# Altium PCB plant_factory.PcbDoc
Units mil, origin at the board's own origin, x right, y up, seen from the top; angles counter-clockwise.
Board outline 4724.41 x 3346.46 mil, 2 copper layers (Top Layer, Bottom Layer); 63 components, 125 nets, 345 pads, 62 vias.
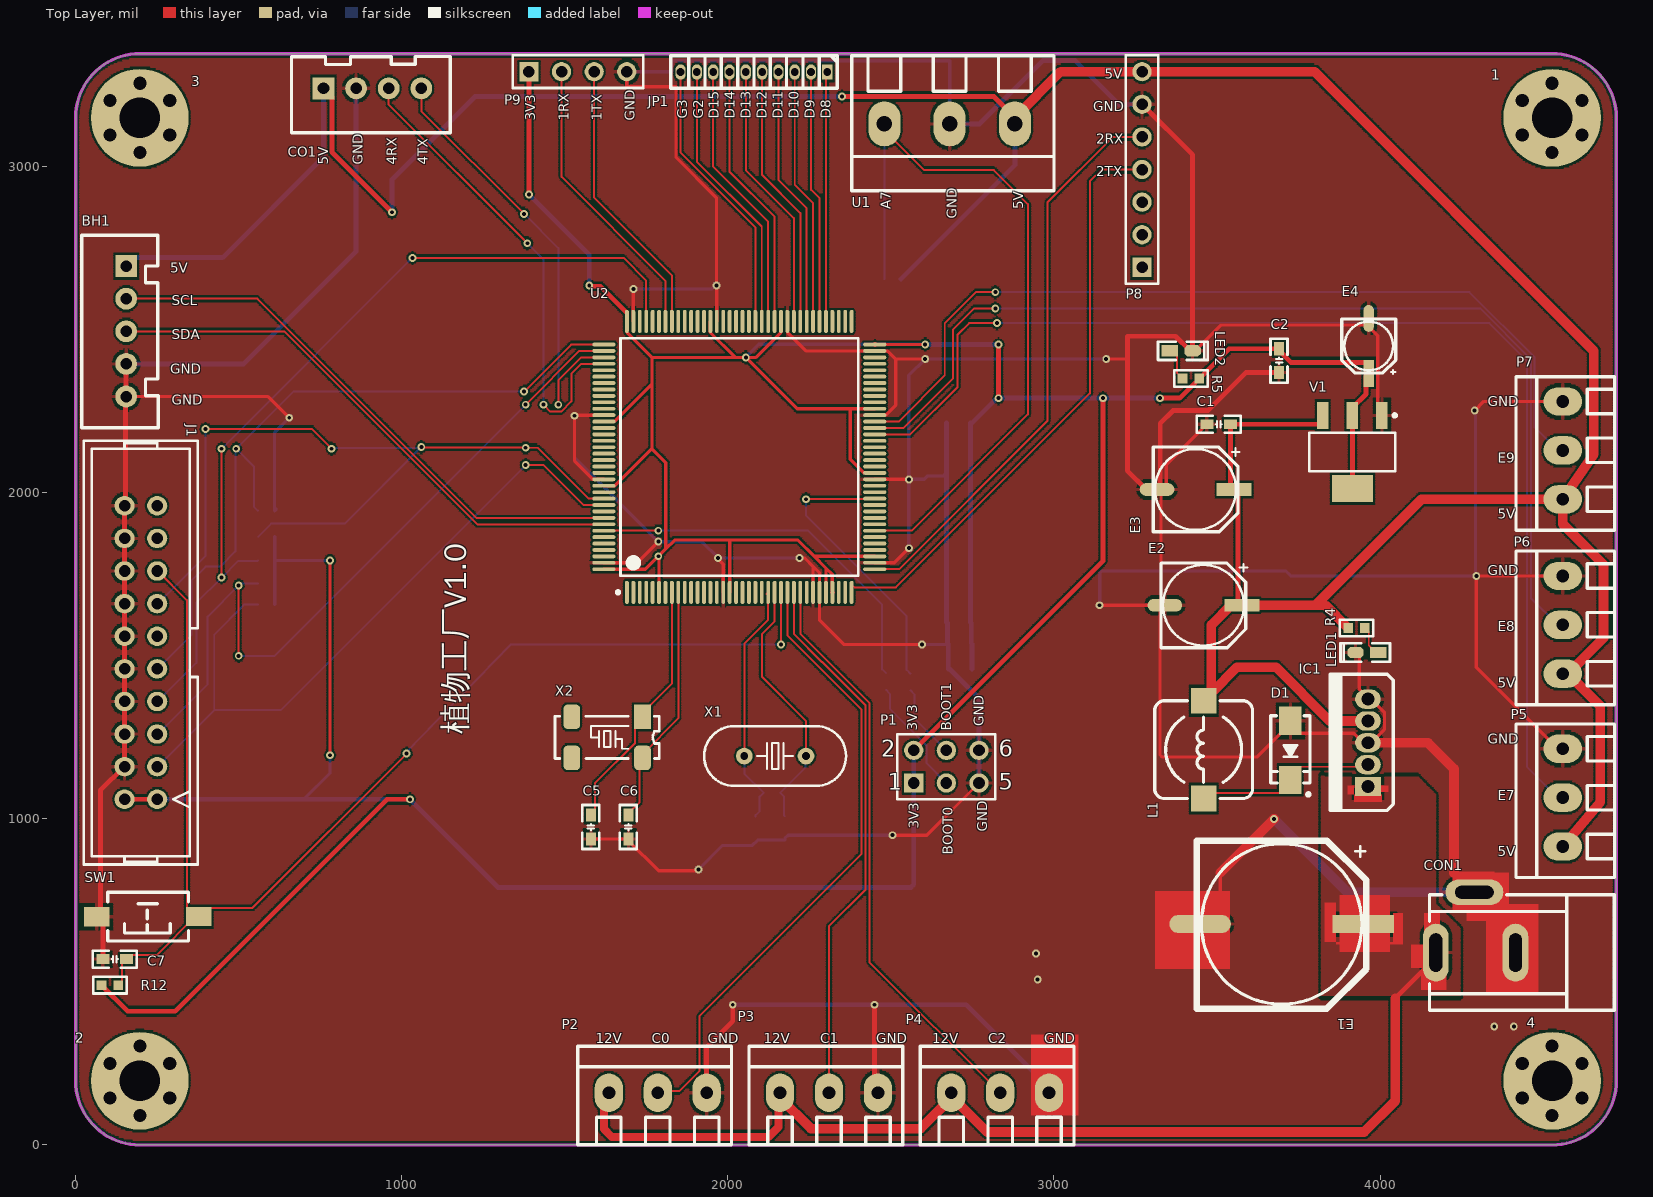
[diagram p0: Top Layer view]
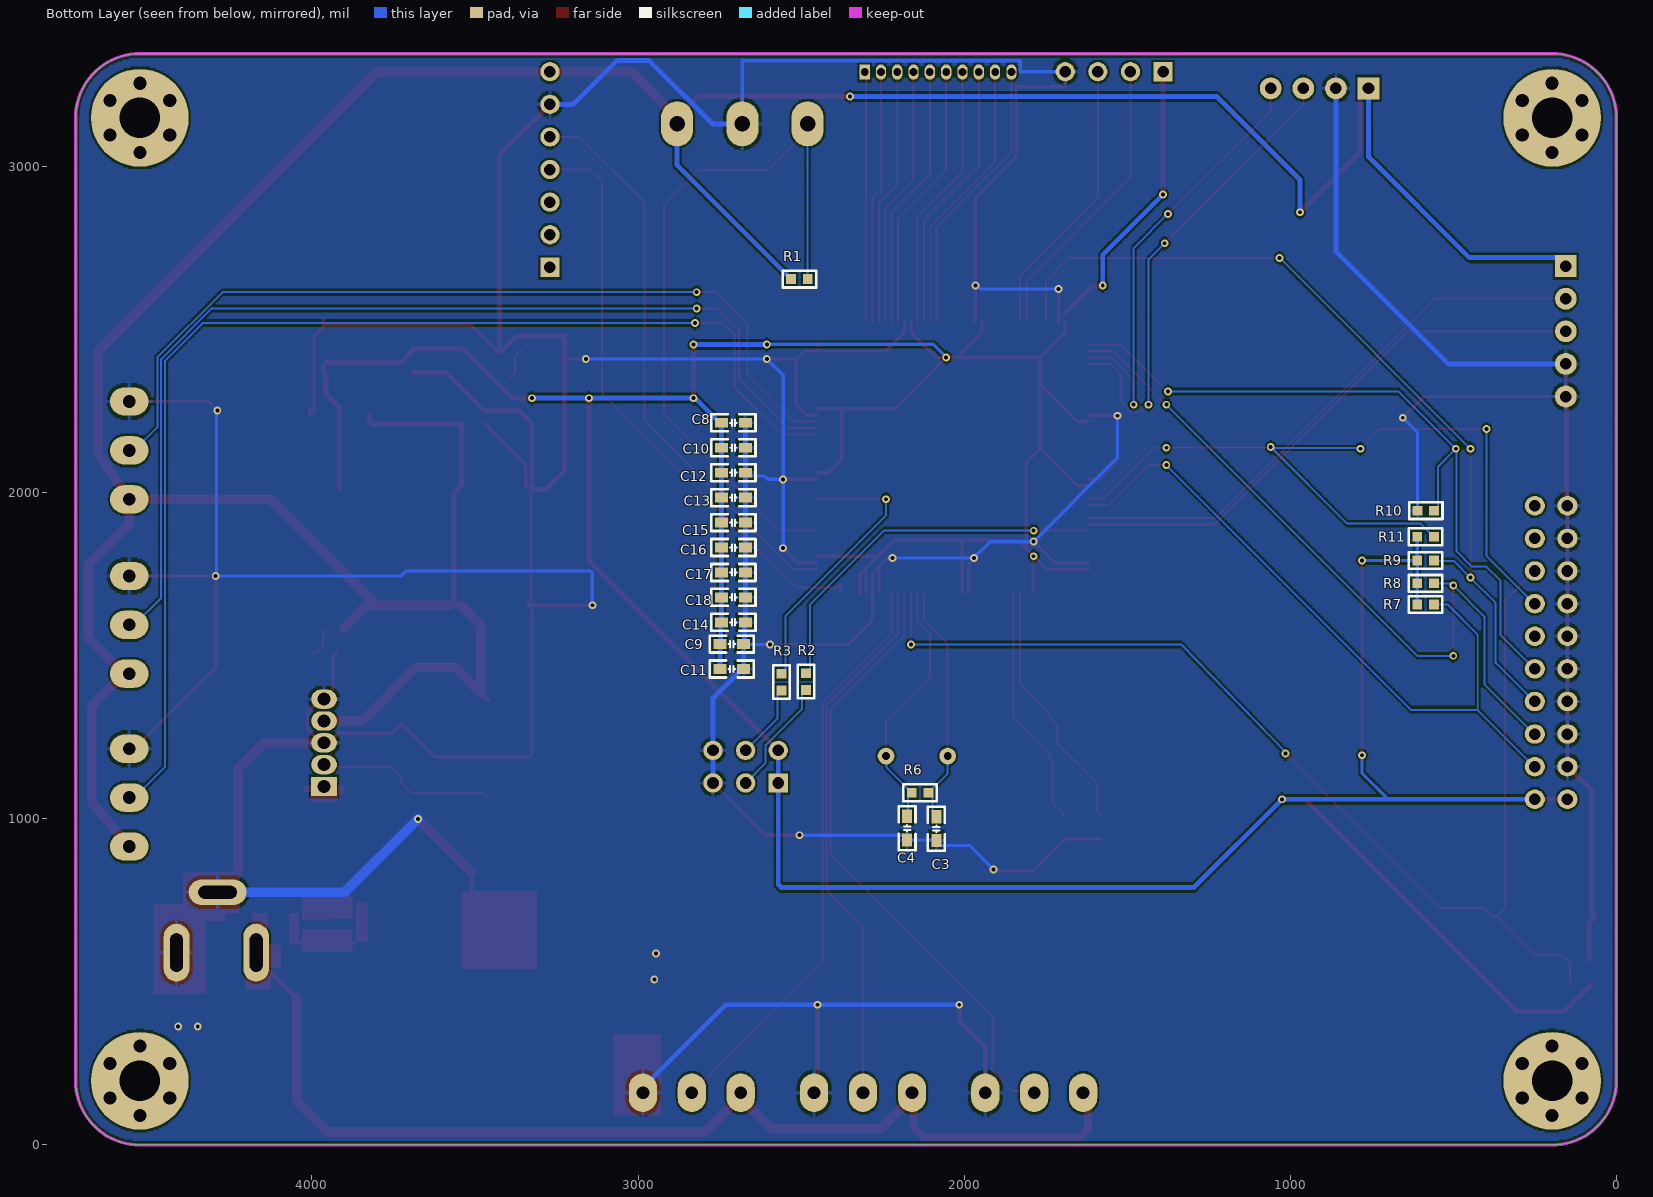
[diagram p1: Bottom Layer view, seen from below]

## Layer stack, top to bottom
Top Solder: solder mask 0.4, Solder Resist, Dk 3.5
Top Layer: signal copper 1.4
Dielectric 1: dielectric 12.6, FR-4, Dk 4.8
Bottom Layer: signal copper 1.4
Bottom Solder: solder mask 0.4, Solder Resist, Dk 3.5

## Board outline
0,196.85 ccw(c196.85,196.85) 196.85,0 4527.56,0 ccw(c4527.56,196.85) 4724.41,196.85 4724.41,3149.61 ccw(c4527.56,3149.61) 4527.56,3346.46 196.85,3346.46 ccw(c196.85,3149.61) 0,3149.61

## Design rules (kind name [scope] priority, off if disabled: settings)
Clearance [All] p1: gap=6 ignorepadtopadclearanceinfootprint=TRUE
PolygonConnect [All] p1: thpad.connectstyle=Relief thpad.reliefconductorwidth=10 thpad.reliefentries=4 thpad.polygonreliefangle="90 Angle" thpad.airgapwidth=10 smdpad.connectstyle=Relief smdpad.reliefconductorwidth=10 smdpad.reliefentries=4 smdpad.polygonreliefangle="90 Angle" smdpad.airgapwidth=10 via.connectstyle=Direct via.reliefconductorwidth=10 via.reliefentries=4 via.polygonreliefangle="90 Angle" via.airgapwidth=10
RoutingVias [All] p1: holewidth=12 width=24 viastyle="Through Hole" minholewidth=12 minwidth=24 maxholewidth=12 maxwidth=24
SilkToSilkClearance [All] p1: silktosilkclearance=2
SilkToSolderMaskClearance [IsPad] p1: minsilkscreentomaskgap=2 clearancetoexposedcopper=TRUE
SolderMaskExpansion [All] p1: expansion=2.5
Width PWR [InNetClass('PWR')] p1: maxlimit=20 minlimit=10 preferedwidth=15
Width [All] p2: maxlimit=6 minlimit=6 preferedwidth=6
28 further rules are at their usual default settings.

## Classes and differential pairs
net class "New Class": NetD1_2 NetLED1_1 NetLED2_1 NetP1_3 NetP1_4 RESET
net class P: PA0 PA1 PA4 PA5 PA6 PA7 PA8 PA11 PA12 PB0 PB1 PB5 PB8 PB9 PB10 PB11 PB12 PB13 PB14 PB15 PC0 PC1 PC2 PC3 PC4 PC5 PC6 PC7 PC8 PC9 PC12 PC13 PD0 PD1 PD2 PD3 PD4 PD5 PD6 PD7 PD8 PD9 PD10 PD11 PD12 PD13 PD14 PD15 PE0 PE1 PE2 PE3 PE4 PE5 PE6 PE7 PE8 PE9 PE10 PE11 PE12 PE13 PE14 PE15 PF0 PF1 PF2 PF3 PF4 PF5 PF6 PF7 PF8 PF9 PF10 PF11 PF12 PF13 PF14 PF15 PG0 PG1 PG2 PG3 PG4 PG5 PG6 PG7 PG8 PG9 PG10 PG11 PG12 PG13 PG14 PG15
net class OSC: OSC32_IN OSC32_OUT OSC_IN OSC_OUT
net class BOOT: BOOT0 BOOT1
net class JTAG: JTCK JTDI JTDO JTMS JTRST
net class UART: SCL SDA UART1_RX UART1_TX UART2_RX UART2_TX UART4_RX UART4_TX
net class PWR: 3V3 5V 12V GND

## Components (designator, comment, footprint, x,y, rotation, side; value= is the part's Value field where it differs from the comment)
1 "M3" "M3 125X300" 4527.56,3149.61 r90 top locked
2 "M3" "M3 125X300" 196.85,196.85 r90 top locked
3 "M3" "M3 125X300" 196.85,3149.61 r90 top locked
4 "M3" "M3 125X300" 4527.56,196.85 r90 top locked
BH1 "HDR-1X5" XH2.54-LI-5P 155,2495 r270 top
C1 "104" C0603_M 3505,2210 r0 top
C2 "104" C0603_M 3690,2405 r90 top
C3 "22pf" C0603_M 2085,970 r270 bottom
C4 "22pf" C0603_M 2175,971.5 r270 bottom
C5 "10pf" C0603_M 1580,975 r270 top
C6 "10pf" C0603_M 1695,975 r270 top
C7 "104" C0603_M 120,570 r180 top
C8 "104" C0603_M 2707.32,2214.53 r0 bottom
C9 "104" C0603_M 2712.32,1536.03 r0 bottom
C10 "104" C0603_M 2707.32,2138.03 r0 bottom
C11 "104" C0603_M 2712.32,1459.53 r0 bottom
C12 "104" C0603_M 2707.32,2061.53 r0 bottom
C13 "104" C0603_M 2707.32,1985.03 r0 bottom
C14 "104" C0603_M 2707.32,1602.53 r0 bottom
C15 "104" C0603_M 2707.32,1908.53 r0 bottom
C16 "104" C0603_M 2707.32,1832.03 r0 bottom
C17 "104" C0603_M 2707.32,1755.53 r0 bottom
C18 "104" C0603_M 2707.32,1679.03 r0 bottom
CO1 "HDR-1X4" XH2.54-LI-4P 910,3240 r0 top
CON1 "3.5*1.3" DC-005 4415,590 r0 top locked
D1 "1N4007" SMA 3725,1210 r270 top
E1 "680uF/35V" "CE G(12.5*13.5)" 3698.01,677.67 r0 top locked
E2 "220uF/10V" "CE D(6.3*7.7)" 3458.11,1655 r0 top
E3 "220uF/10V" "CE D(6.3*7.7)" 3434.05,2010 r0 top
E4 "47uF/10V" "CE B(4*5.4)" 3965,2450 r270 top
IC1 "LM2596T" TO220-5A 3962.76,1099.35 r90 top
J1 "JTAG" JTAG_20 200,1510 r90 top locked
JP1 "HDR-1X10" HDR1.27-LI-10P 2080,3290 r180 top
L1 "33uH" CDRH74 3458.76,1212.21 r90 top
LED1 "绿色" LED0603_G 3959.39,1510.26 r180 top
LED2 "绿色" LED0603_G 3390,2434.74 r0 top
P1 "Header 3X2" HDR2X3 2570,1110 r0 top
P2 "HDR-1X3" KF128-3.81-3P 1785,160 r0 top locked
P3 "HDR-1X3" KF128-3.81-3P 2310,160 r0 top locked
P4 "HDR-1X3" KF128-3.81-3P 2835,160 r0 top locked
P5 "HDR-1X3" KF128-3.81-3P 4560,1065 r90 top
P6 "HDR-1X3" KF128-3.81-3P 4560,1595 r90 top
P7 "HDR-1X3" KF128-3.81-3P 4560,2130 r90 top
P8 "Header 7" HDR1X7 3270,2691.06 r90 top
P9 "Header 4" HDR1X4 1390,3291.06 r0 top
R1 "4.7K" R0603_L 2505,2655 r0 bottom
R2 "10K" R0603_L 2485,1420.86 r270 bottom
R3 "10K" R0603_L 2560,1419.41 r90 bottom
R4 "750" R0603_L 3927.6,1585 r0 top
R5 "510" R0603_L 3420,2350 r180 top
R6 "1M" R0603_L 2135,1080 r180 bottom
R7 "10K" R0603_L 585,1657.32 r180 bottom
R8 "10K" R0603_L 585,1722.32 r180 bottom
R9 "10K" R0603_L 585,1792.32 r180 bottom
R10 "10K" R0603_L 584.41,1945 r180 bottom
R11 "10K" R0603_L 585,1865 r180 bottom
R12 "10K" R0603_L 105,490 r180 top
SW1 "3x6x5" "SW SMD-3*6*2.5" 220,700 r180 top
U1 "DS18B20" KF128-5.08-3P 2680,3131 r180 top
U2 "STM32F101ZET6" LQFP144_N 2035,2110 r90 top locked
V1 "AMS1117-3V3" SOT223_L 3915,2125 r270 top
X1 "8MHz" HC-49S 2145,1192.65 r0 top
X2 "Comment" MC-306 1630,1250 r180 top

## Footprints (in the part's own frame and the unit in brackets; to place one, negate y for a bottom-side part, rotate by r counter-clockwise, add the part's x,y. Pads: shape width x height; smd on the part's side, far side on the other; paste and mask are expansions set on the pad)
C0603_M [mil] "贴片MLCC电容"
  rect 40x30 smd: 1(-36.5,0) 2(36.5,0)
  silkscreen extent -68,-26 68,26, body extent -31,-16 31,16, height 33
CDRH74 [mm] "7.3*7.3*4.5mm（长宽高）"
  rect 2x2 smd: 1(-3.81,0) 2(3.81,0)
  silkscreen extent -3.81,-3.81 3.81,3.81, body extent -3.65,-3.65 3.65,3.65, height 4.52
"CE B(4*5.4)" [mm] "贴片电解电容，直径4mm，高5.4mm"
  rect 2.1x0.8 smd: 1(2.15,0)
  oval 2.1x0.8 smd: 2(-2.15,0)
  silkscreen extent -2.1,-2.1 2.2,2.1, body extent -2.3,-2.15 2.3,2.15, height 5.45
"CE D(6.3*7.7)" [mm] "贴片电解电容，直径6.3mm，¸"
  rect 2.7x1 smd: 1(3,0)
  oval 2.7x1 smd: 2(-3,0)
  silkscreen extent -3.3,-3.3 3.43,3.3, body extent -3.5,-3.3 3.5,3.3, height 7.75
"CE G(12.5*13.5)" [mm] "贴片电解电容，直径12.5mm，高"
  rect 4.8x1.4 smd: 1(6.35,0)
  oval 4.8x1.4 smd: 2(-6.35,0)
  silkscreen extent -6.6,-6.6 6.6,6.5, body extent -7.15,-6.5 7.15,6.5, height 13.58
DC-005 [mm] "DC母座5.5mm"
  oval 2x4.5 hole 1 slot 3 at 90 deg: 1(-6.2,0) 2(0,0)
  oval 4.5x2 hole 1 slot 3 at 0 deg: 3(-3.2,4.7)
  silkscreen extent -6.7,-4.5 7.7,4.5, body extent -6.55,-4.5 7.5,4.8, height 11.25
HC-49S [mm] "封装?"
  round 1.3 hole 0.6: 1(-2.4,0) 2(2.4,0)
  silkscreen extent -5.52,-2.32 5.52,2.33, body extent -5.52,-2.32 5.53,2.33, height 4.18
HDR1.27-LI-10P [mm] "直插，脚距：1.27mm"
  rect 0.8x1.2 hole 0.6: 1(-5.715,0)
  oval 0.8x1.2 hole 0.6: 2(-4.445,0) 3(-3.175,0) 4(-1.905,0) 5(-0.635,0) 6(0.635,0) 7(1.905,0) 8(3.175,0) 9(4.445,0) 10(5.715,0)
  silkscreen extent -6.48,-1.27 6.48,1.27, body extent -6.35,-1.2 6.35,1.2, height 4.48
HDR1X4 [mm] "Connector; Header; 4 Position"
  rect 1.5x1.5 hole 0.9: 1(0,0)
  round 1.5 hole 0.9: 2(2.54,0) 3(5.08,0) 4(7.62,0)
  silkscreen extent -1.27,-1.27 8.89,1.27
HDR1X7 [mm] "Connector; Header; 7 Position"
  rect 1.5x1.5 hole 0.9: 1(0,0)
  round 1.5 hole 0.9: 2(2.54,0) 3(5.08,0) 4(7.62,0) 5(10.16,0) 6(12.7,0) 7(15.24,0)
  silkscreen extent -1.27,-1.27 16.51,1.27
HDR2X3 [mm] "Connector; Header; 3x2 Position"
  rect 1.5x1.5 hole 0.9: 1(0,0)
  round 1.5 hole 0.9: 2(0,2.54) 3(2.54,0) 4(2.54,2.54) 5(5.08,0) 6(5.08,2.54)
  silkscreen extent -1.27,-1.27 6.35,3.81
JTAG_20 [mm]
  oval 1.5x1.575 hole 0.9: 1(-11.43,-1.27) 2(-11.43,1.27) 3(-8.89,-1.27) 4(-8.89,1.27) 5(-6.35,-1.27) 6(-6.35,1.27) 7(-3.81,-1.27) 8(-3.81,1.27) 9(-1.27,-1.27) 10(-1.27,1.27) 11(1.27,-1.27) 12(1.27,1.27) 13(3.81,-1.27) 14(3.81,1.27) 15(6.35,-1.27) 16(6.35,1.27) 17(8.89,-1.27) 18(8.89,1.27) 19(11.43,-1.27) 20(11.43,1.27)
  silkscreen extent -16.51,-4.45 16.51,4.45
KF128-3.81-3P [mm] "螺钉式接线端子，脚距3.81mm"
  oval 2.2x3 hole 1: 1(-3.81,0) 2(0,0) 3(3.81,0)
  silkscreen extent -6.22,-4.04 5.74,3.63, body extent -6.21,-3.9 5.72,3.5, height 8.55
KF128-5.08-3P [mm] "螺钉式接线端子，脚距5.08mm"
  oval 2.5x3.5 hole 1.2: 1(-5.08,0) 2(0,0) 3(5.08,0)
  silkscreen extent -8.13,-5.31 7.62,5.21, body extent -8.12,-5.3 7.62,5.2, height 14.18
LED0603_G [mil] "绿色0603LED"
  rect 50x35 smd: 1(-35,0.26)
  oct 50x35 smd: 2(35,0.26)
  silkscreen extent -71,-28 81,28, body extent -32,-16 31,16, height 18
LQFP144_N [mm] "Thin QFP, 144-Leads, Body 20x20mm, Pitch 0.5mm, IPC Medium Density联系卖家免费查找封装"
  oval 1.8x0.3 smd: 1(-10.55,8.75) 2(-10.55,8.25) 3(-10.55,7.75) 4(-10.55,7.25) 5(-10.55,6.75) 6(-10.55,6.25) 7(-10.55,5.75) 8(-10.55,5.25) 9(-10.55,4.75) 10(-10.55,4.25) 11(-10.55,3.75) 12(-10.55,3.25) 13(-10.55,2.75) 14(-10.55,2.25) 15(-10.55,1.75) 16(-10.55,1.25) 17(-10.55,0.75) 18(-10.55,0.25) 19(-10.55,-0.25) 20(-10.55,-0.75) 21(-10.55,-1.25) 22(-10.55,-1.75) 23(-10.55,-2.25) 24(-10.55,-2.75) 25(-10.55,-3.25) 26(-10.55,-3.75) 27(-10.55,-4.25) 28(-10.55,-4.75) 29(-10.55,-5.25) 30(-10.55,-5.75) 31(-10.55,-6.25) 32(-10.55,-6.75) 33(-10.55,-7.25) 34(-10.55,-7.75) 35(-10.55,-8.25) 36(-10.55,-8.75) 73(10.55,-8.75) 74(10.55,-8.25) 75(10.55,-7.75) 76(10.55,-7.25) 77(10.55,-6.75) 78(10.55,-6.25) 79(10.55,-5.75) 80(10.55,-5.25) 81(10.55,-4.75) 82(10.55,-4.25) 83(10.55,-3.75) 84(10.55,-3.25) 85(10.55,-2.75) 86(10.55,-2.25) 87(10.55,-1.75) 88(10.55,-1.25) 89(10.55,-0.75) 90(10.55,-0.25) 91(10.55,0.25) 92(10.55,0.75) 93(10.55,1.25) 94(10.55,1.75) 95(10.55,2.25) 96(10.55,2.75) 97(10.55,3.25) 98(10.55,3.75) 99(10.55,4.25) 100(10.55,4.75) 101(10.55,5.25) 102(10.55,5.75) 103(10.55,6.25) 104(10.55,6.75) 105(10.55,7.25) 106(10.55,7.75) 107(10.55,8.25) 108(10.55,8.75)
  oval 0.3x1.8 smd: 37(-8.75,-10.55) 38(-8.25,-10.55) 39(-7.75,-10.55) 40(-7.25,-10.55) 41(-6.75,-10.55) 42(-6.25,-10.55) 43(-5.75,-10.55) 44(-5.25,-10.55) 45(-4.75,-10.55) 46(-4.25,-10.55) 47(-3.75,-10.55) 48(-3.25,-10.55) 49(-2.75,-10.55) 50(-2.25,-10.55) 51(-1.75,-10.55) 52(-1.25,-10.55) 53(-0.75,-10.55) 54(-0.25,-10.55) 55(0.25,-10.55) 56(0.75,-10.55) 57(1.25,-10.55) 58(1.75,-10.55) 59(2.25,-10.55) 60(2.75,-10.55) 61(3.25,-10.55) 62(3.75,-10.55) 63(4.25,-10.55) 64(4.75,-10.55) 65(5.25,-10.55) 66(5.75,-10.55) 67(6.25,-10.55) 68(6.75,-10.55) 69(7.25,-10.55) 70(7.75,-10.55) 71(8.25,-10.55) 72(8.75,-10.55) 109(8.75,10.55) 110(8.25,10.55) 111(7.75,10.55) 112(7.25,10.55) 113(6.75,10.55) 114(6.25,10.55) 115(5.75,10.55) 116(5.25,10.55) 117(4.75,10.55) 118(4.25,10.55) 119(3.75,10.55) 120(3.25,10.55) 121(2.75,10.55) 122(2.25,10.55) 123(1.75,10.55) 124(1.25,10.55) 125(0.75,10.55) 126(0.25,10.55) 127(-0.25,10.55) 128(-0.75,10.55) 129(-1.25,10.55) 130(-1.75,10.55) 131(-2.25,10.55) 132(-2.75,10.55) 133(-3.25,10.55) 134(-3.75,10.55) 135(-4.25,10.55) 136(-4.75,10.55) 137(-5.25,10.55) 138(-5.75,10.55) 139(-6.25,10.55) 140(-6.75,10.55) 141(-7.25,10.55) 142(-7.75,10.55) 143(-8.25,10.55) 144(-8.75,10.55)
  silkscreen extent -10.67,-9.25 9.25,9.57, body extent -11,-11 11,11, height 1.45
"M3 125X300" [mil] "M3螺丝孔，孔125Mil，焊盘300Mil"
  round 40 hole 40: 1(-106,0) 1(-53,91.8) 1(-53,-91.8) 1(53,91.8) 1(53,-91.8) 1(106,0)
  round 300 hole 125: 1(0,0)
MC-306 [mm] "8mm*3.2mm*2.54mm(长*宽*高)"
  rect 1.3x1.9 smd: 1(-2.75,-1.6)
  rrect50% 1.3x1.9 smd: 2(2.75,-1.6) 3(2.75,1.6) 4(-2.75,1.6)
  silkscreen extent -4.06,-1.65 4.06,1.65, body extent -4,-1.63 4,1.63, height 2.56
R0603_L [mil] "1/10W贴片电阻"
  rect 30x30 smd: 1(-25.59,0) 2(25.59,0)
  silkscreen extent -51,-26 51,26, body extent -31,-16 31,16, height 16
SMA [mm] "4.5x2.6*2.2mm（长宽高，不包括引脚）联系卖家 免费查找"
  rect 2.2x1.75 smd: 1(-2.3,0) 2(2.3,0)
  silkscreen extent -2.7,-1.52 3.56,1.52, body extent -2.55,-1.3 2.55,1.3, height 2.15
SOT223_L [mm] "SOT223, 4-Leads, Body 6.5x3.5mm, Pitch 2.3mm, Lead Span 7mm, IPC High Density"
  rect 2.1x0.9 smd: 1(-2.85,2.3) 2(-2.85,0) 3(-2.85,-2.3)
  rect 2.1x3.2 smd: 4(2.85,0)
  silkscreen extent -2.97,-3.35 1.5,3.43, body extent -1.85,-3.35 1.85,3.35, height 1.7
"SW SMD-3*6*2.5" [mm] "3*6*2.5mm"
  rect 2x1.5 smd: 1(-3.996,-0.02) 2(3.937,0)
  silkscreen extent -3.21,-1.9 3.09,1.9, body extent -4,-1.75 4,1.75, height 2.59
TO220-5A [mm] "220，5脚晶体管"
  rect 1.5x2 hole 1: 1(0,0)
  oval 1.5x2 hole 1: 2(1.7,0) 3(3.4,0) 4(5.1,0) 5(6.8,0)
  silkscreen extent -1.88,-1.96 8.74,2.95, body extent -1.65,-1.8 8.45,2.7, height 17.5
XH2.54-LI-4P [mm] "接插件，4P"
  rect 1.7x1.7 hole 0.9: 1(-3.81,0)
  round 1.7 hole 0.9: 2(-1.27,0) 3(1.27,0) 4(3.81,0)
  silkscreen extent -6.3,-3.45 6.07,2.49, body extent -6.31,-3.3 6.31,2.4, height 7.05
XH2.54-LI-5P [mm] "接插件，5P  淘宝ID:黄晶宝石   店铺网址:https://shop463601444.taobao.com"
  rect 1.7x1.7 hole 0.9: 1(-5.08,0)
  round 1.7 hole 0.9: 2(-2.54,0) 3(0,0) 4(2.54,0) 5(5.08,0)
  silkscreen extent -7.48,-3.45 7.52,2.49, body extent -7.58,-3.3 7.58,2.4, height 7.05

## Part data
1 2 3 4: "铜柱孔"
BH1: library part "Header 5", "5P接插件"
C1 C2 C3 C4 C5 C6 C7 C8 C9 C10 C11 C12 C13 C14 C15 C16 C17 C18: library part C, "贴片电容/MLCC电容"
CO1: library part "Header 4", "4P接插件"
CON1: library part P-DC, "低压电源接口"
D1: "整流二极管"
E1 E2 E3 E4: library part CE_SMD, "贴片电解电容"
IC1: "3A DC-DC降压芯片"
J1: library part "HEADER 10X2"
JP1: library part "Header 10", "10P连接器"
L1: library part L-CDRH, "CDRH功率屏蔽电感"
LED1 LED2: library part LED-SMD, "贴片LED"
P1: "Header, 3-Pin, Dual row", LatestRevisionDate=17-Jul-2002, LatestRevisionNote="Re-released for DXP Platform.", Publisher="Altium Limited"
P2 P3 P4 P5 P6 P7: library part "Header 3", "3P接插件"
P8: "Header, 7-Pin", LatestRevisionDate=17-Jul-2002, LatestRevisionNote="Re-released for DXP Platform.", Publisher="Altium Limited"
P9: "Header, 4-Pin", LatestRevisionDate=17-Jul-2002, LatestRevisionNote="Re-released for DXP Platform.", Publisher="Altium Limited"
R1 R2 R3 R4 R5 R6 R7 R8 R9 R10 R11 R12: library part R, "贴片电阻"
SW1: library part SW-PB, "微动开关"
U1: library part kf128-5.08-3p
U2: "STM32 ARM-based 32-bit MCU Access Line with 512 kB Flash, 48 kB Internal RAM, -40 to +85癈 Temperature, 144-Pin LQFP, Tray"
V1: library part AMS1117, "三端稳压芯片"
X1: library part XTAL-2P, "2脚无源晶振(谐振器）"

## Via types
v1: diameter 24, hole 12, Top Layer to Bottom Layer, tented both sides, 62 vias

## Nets (pads, with @x,y where several pads share a name; then routed paths per layer and width w, separated by ;. In a path a pad name is that pad's centre, name@x,y a point inside that pad or via, vN(x,y) a via of type N, cw(c..) or ccw(c..) an arc to the next point about the centre after c; other vN are vias at no path point)
3V3: C2.2 C8.2 C9.2 C10.2 C11.2 C12.2 C13.2 C14.2 C15.2 C16.2 C17.2 C18.2 E4.1 J1.1 J1.2 P1.1 P1.2 P9.1 R5.1 R7.1 R8.1 R9.1 R11.1 R12.2 U2.6 U2.17 U2.32 U2.33 U2.39 U2.52 U2.62 U2.72 U2.84 U2.95 U2.108 U2.121 U2.131 U2.144 V1.2 V1.4 | length 14999.6
  Top Layer w10: v1(780,1195) v1(780,1792.31) ; U2.144 1747,1765.51 v1(1786.65,1805.16) ; U2.131 1619.99,2021.76 1653.74,2021.76 1767.12,2135.14 ; U2.121 1619.99,2218.61 1653.74,2218.61 1767.12,2331.99 ; U2.108 1690.86,2525.01 1690.86,2491.26 1767.12,2415 ; U2.6 1788.59,1694.99 1788.59,1803.22 v1(1786.65,1805.16) ; U2.95@1946.07,2491.26 1946.07,2525.01 1946.76,2524.32 1946.76,2491.26 2023.02,2415 ; U2.17 2005.47,1855 ; U2.84@2162.61,2525.01 2162.61,2491.26 2086.35,2415 v1(2055,2415) ; U2.32 2300.75,1769.25 ; U2.33@2320.15,1694.93 2320.15,1749.85 2300.75,1769.25 ; U2.39 2265.12,1804.88 ; U2.52 2450.01,2061.13 2416.26,2061.13 2375,2102.39 2375,2257.64 ; U2.62 2375,2257.64 ; U2.72@2450.61,2454.74 v1@2604.74,2454.74 ; 1767.12,2135.14 1809.65,2092.6 1809.65,1828.16 ; 1767.12,2135.14 1767.12,2331.99 ; 1767.12,2331.99 1767.12,2415 ; 1767.12,2415 2023.02,2415 ; v1(1786.65,1805.16) 1809.65,1828.16 ; 1809.65,1828.16 1836.49,1855 2005.47,1855 ; 2005.47,1855 2215,1855 2265.12,1804.88 ; 2023.02,2415 v1(2055,2415) ; v1(2055,2415) 2212.36,2257.64 2375,2257.64 ; 2265.12,1804.88 2300.75,1769.25
  Top Layer w15: R12.2 159.42,410 305,410 955,1060 v1(1025,1060) ; J1.2 J1.1 ; v1(1390,2915) P9.1 ; v1(1575,2635) 1576.72,2633.28 1608.93,2633.28 U2.108@1688.92,2553.29 ; U2.33@2320.15,1694.93 U2.33 ; U2.72 U2.72@2450.61,2454.74 ; P1.2 3150,1790 v1(3150,2290) ; v1@2604.74,2454.74 v1(2605,2455) ; v1(2830,2290) v1(2830,2454.49) ; v1(3325,2290) 3385.59,2290 R5.1 3537.09,2441.5 C2.2 3690,2436.5 3727.31,2399.19 3956.75,2399.19 3965,2390.95 E4.1 3956.75,2357.11 3956.75,2302.58 3915,2260.83 V1.2 V1.4
  Bottom Layer w10: R7.1 R8.1 R9.1 ; R11.1 R9.1 ; 700,1060 780,1140 v1(780,1195) ; v1(780,1792.31) R9.1 ; v1(2055,2415) 2095,2455 v1(2605,2455)
  Bottom Layer w15: J1.1@255,1065 J1.1 700,1060 v1(1025,1060) 1295,790 2561.21,790 2570,798.79 P1.1 P1.2 ; v1(1390,2915) 1575,2730 v1(1575,2635) ; v1(2605,2455) ccw(c2606.24,2456.24) 2606.24,2454.49 v1(2830,2454.49) ; C11.2 C9.2 2746.32,1538.53 2746.32,1600.03 C14.2 C18.2 C17.2 C16.2 C15.2 C13.2 C12.2 C10.2 C8.2 2748.82,2214.53 2822.57,2288.28 2828.28,2288.28 v1(2830,2290) v1(3150,2290) v1(3325,2290)
5V: BH1.1 C1.2 CO1.1 E2.1 E3.1 IC1.4 L1.2 P5.1 P6.1 P7.1 P8.7 R1.2 R4.1 U1.1 V1.3 | length 11215.5
  Top Layer w15: CO1.1 785.96,3214.04 785.96,3044.04 v1(970,2860) ; v1(2350,3215) 2815.69,3215 2880,3150.69 U1.1 ; L1.2 L1.2@3482.43,1385.88 ; E2.1@3542.76,1655 E2.1 3564.35,1666.87 3564.35,1997.82 E3.1 3541.5,2020.66 C1.2 3814.23,2210 3824.45,2220.22 V1.3 ; P5.1 P5.1@4575.75,915 ; P6.1 P6.1@4575.75,1445
  Top Layer w30: U1.1@2880,3150.69 3020.38,3291.06 P8.7 3798.94,3291.06 4655,2435 4655,2118.31 P7.1 ; E2.1@3542.76,1655 3482.43,1594.68 3482.43,1385.88 3561.55,1465 3680.57,1465 3845.42,1300.14 IC1.4 ; E2.1 3802.3,1655 ; R4.1 3832,1655 3802.3,1655 ; P5.1 4566.57,922.76 4675,1051 4675,1345.75 4575.75,1445 4685,1554.25 4685,1779.36 4560,1904.36 P7.1 ; 3802.3,1655 4127.3,1980 P7.1
  Bottom Layer w15: BH1.1 180.96,2720.96 450.96,2720.96 760,3030 CO1.1 ; v1(970,2860) 970,2960 1225,3215 v1(2350,3215) ; R1.2 2880,3004.42 U1.1
12V: CON1.1 E1.1 IC1.1 P2.1 P3.1 P4.1 | length 3389.1
  Top Layer w15: P3.1@2155,155 P3.1 P3.1@2160,144.25 ; P4.1@2685,144.25 P4.1 2696.89,148.11 P4.1@2696.89,138.11 ; 4046.34,449.37 4170.92,573.94 CON1.1
  Top Layer w20: 1620,48.79 1620,50
  Top Layer w25: 1620,48.79 1643.79,25 2125,25 2155,55 P3.1@2155,155 ; 1620,50 P2.1@1620,176.21
  Top Layer w30: P3.1@2160,144.25 2254.25,50 2590.75,50 P4.1@2685,144.25 ; P4.1@2696.89,138.11 2795,40 3951.21,40 4046.34,135.13 4046.34,449.37
BOOT0: R2.1 U2.138 | length 1162.7
  Top Layer w6: U2.138 v1(1786.65,1883.62)
  Bottom Layer w6: v1(1786.65,1883.62) 2246.38,1883.62 2473,1657 2473,1458.45 R2.1
BOOT1: R3.2 U2.48 | length 880.3
  Top Layer w6: v1(2239.49,1980) 2240.51,1981.02 2447.28,1981.02 2448.31,1982.05 2449.33,1981.02 U2.48
  Bottom Layer w6: v1(2239.49,1980) 2240,1979.49 2240,1930 2548,1622 2548,1457 R3.2
GND: BH1.4 BH1.5 C1.1 C2.1 C3.2 C4.2 C5.2 C6.2 C7.2 C8.1 C9.1 C10.1 C11.1 C12.1 C13.1 C14.1 C15.1 C16.1 C17.1 C18.1 CO1.2 CON1.2 CON1.3 D1.1 E1.2 E2.2 E3.2 E4.2 IC1.3 IC1.5 J1.4 J1.6 J1.8 J1.10 J1.12 J1.14 J1.16 J1.18 J1.20 LED1.2 LED2.2 P1.5 P1.6 P2.3 P3.3 P4.3 P5.3 P6.3 P7.3 P8.6 P9.4 R10.1 SW1.2 U1.2 U2.16 U2.30 U2.31 U2.38 U2.51 U2.61 U2.71 U2.83 U2.94 U2.107 U2.120 U2.130 U2.143 V1.1 | length 26399.7
  Top Layer w10: BH1.5@152.5,2292.5 BH1.5 590,2295 v1(655,2230) ; C5.2 C6.2 1695,933.5 1787.5,841 v1@1907.05,841 ; U2.143 1721.85,1785.2 v1(1786.65,1850) ; U2.130 1619.3,2041.45 1585.55,2041.45 1530,2097 v1(1530,2236.08) 1531.87,2237.95 U2.120 ; P9.4 1690,3245 1841,3245 1841,3028.81 1965,2904.81 v1(1965,2635) 1966.1,2633.9 U2.94 ; U2.107 v1(1710.2,2625) ; v1(1970,1800) 1970,1796.21 1985.79,1780.42 U2.16 ; U2.83@2182.98,2525.7 U2.83 2182.98,2525.01 2182.98,2491.26 2239.44,2434.8 U2.71 2450.7,2434.46 2490.54,2434.46 2515,2410 ; v1(2220,1800) 2235,1800 2261.38,1773.62 ; U2.30 2261.38,1773.62 ; U2.38 2510.2,1785.2 v1(2555,1830) ; U2.51 v1(2555,2041.1) ; U2.61 2450.7,2238.3 2484.45,2238.3 2515,2268.85 2515,2410 ; v1(2505,950) 2610,950 P1.5 ; v1(2595,1535) 2355,1535 2281.06,1608.94 U2.31 2281.06,1753.94 2261.38,1773.62 ; v1(2605,2410) 2515,2410 ; v1(3140,1655) E2.2@3338.57,1655 ; v1(3160,2410) 3225,2410 ; LED2.2 3432.5,2435 3511.56,2514.05 3955.07,2514.05 E4.2@3965,2523.98 ; E1.2 3489.1,677.67 3509.94,698.52 3509.94,834.94 ; C1.1 3463.5,2210 3453.5,2200 3453.5,2195 3344.41,2085.91 3344.41,2023.57 3330.84,2010 E3.2 3327.97,1997.97 3327.97,1667.03 E2.2 E2.2@3338.57,1655 ; LED1.2 3935.63,1498.75 3935.63,1397.63 3962.76,1370.5 IC1.5 3972.6,1367.07 4013.13,1326.54 4013.13,1273.74 3972.6,1233.21 IC1.3 3948,1233.21 3918.97,1262.24 3754.45,1262.24 3725,1291.69 3623.31,1190 3330.86,1190 3325,1195.86 3325,1641.43 E2.2@3338.57,1655 ; E4.2 E4.2@3965,2523.98 ; V1.1@4005.55,2260.83 V1.1 3992.83,2249.92 3992.83,2481.22 3965,2509.05 E4.2@3965,2523.98 ; 4226.52,834 4285.47,775.05 CON1.3 ; v1(4290,2251.78) 4318.22,2280 4550,2280 4555,2275 P7.3 ; P5.3 4544.25,1215 4295,1464.25 v1(4295,1745) P6.3
  Top Layer w15: C7.2 78.5,570 83.5,575 83.5,681.5 SW1.2 75.87,710.87 75.87,1087.34 148.53,1160 J1.4 J1.6 J1.8 J1.10 J1.12 J1.14 J1.16 J1.18 J1.20 152.5,1962.5 BH1.5@152.5,2292.5 ; BH1.5 BH1.4 ; P2.3 1935,299.53 2015,379.53 v1(2015,430) ; v1(2450,430) 2450,170 P3.3 P3.3@2465,165 ; P4.3 P4.3@2990,165 ; P8.6 3425,3036.06 LED2.2 3417.5,2435 3372.5,2480 3225,2480 3225,2410 3225,2067.48 3282.48,2010 E3.2 3325.91,2019.96 3325.91,2212.69 3365,2251.78 3471.64,2251.78 3588.36,2368.5 C2.1
  Top Layer w30: 3509.94,834.94 v1(3675,1000) ; IC1.3@3972.6,1233.21 4146.79,1233.21 4226.52,1153.48 4226.52,834
  Bottom Layer w10: R10.1@615,1950 R10.1 610,2185 v1(655,2230) ; v1(1530,2236.08) 1530,2106.65 v1(1786.65,1850) 1920,1850 v1(1970,1800) v1(2220,1800) ; P9.4 1828.25,3291.06 1828.25,3324.62 2680,3324.62 U1.2 ; v1(1710.2,2625) 1951.21,2625 1961.21,2635 v1(1965,2635) ; v1(1910,845) 1983.5,918.5 2075,918.5 2091.5,935 C4.2 2175,940 2185,950 v1(2505,950) ; v1(2555,1830) v1(2555,2041.1) ; v1(2595,1535) 2674.8,1535 C9.1 ; C12.1 2660.82,2051.53 2612.52,2051.53 2602.09,2041.1 v1(2555,2041.1) ; v1(3140,1655) 3140,1754.14 3145.86,1760 3711.03,1760 3726.03,1745 v1(4295,1745) 4292.5,1747.5 4292.5,2249.28 v1(4290,2251.78) ; v1(3160,2410) v1(2605,2410) 2555,2360 v1(2555,2041.1)
  Bottom Layer w15: BH1.4 515,2395 860,2740 CO1.2 ; v1(2015,430) v1(2450,430) 2730.75,430 2985,175.75 P4.3 ; C8.1 C10.1 C12.1 C13.1 C15.1 C16.1 C17.1 C18.1 C14.1 2673.32,1600.03 2673.32,1538.53 C9.1 C11.1 2680.82,1459.53 2770,1370.35 P1.6 P1.5 ; U1.2 2771.63,3131 2965.63,3325 3065,3325 3198.94,3191.06 P8.6
  Bottom Layer w30: v1(3675,1000) 3899.95,775.05 CON1.3
  other v1: 4350,363 4410,363 2950,507 2945,587
JTCK: J1.9 R10.2 U2.109 | length 2297.3
  Top Layer w6: v1(492.31,2135) v1@492.31,2142.31 ; v1(1375,2310) 1519.49,2454.49 1619.13,2454.49 1619.39,2454.74 U2.109
  Bottom Layer w6: J1.9 251.47,1460 355,1563.53 355,1730 398.28,1773.28 443.28,1773.28 490,1820 490,2132.69 v1(492.31,2135) ; R10.2 546.82,1957 546.82,2080.5 v1(492.31,2135) ; v1@1385,2310 v1(1375,2310) 667.31,2310 v1(492.31,2135)
JTDI: J1.5 R8.2 U2.110 | length 2345.2
  Top Layer w6: v1(500,1500) v1(500,1715.93) ; v1(1380,2270) 1544.8,2434.8 U2.110
  Bottom Layer w6: J1.5 251.47,1260 404.52,1413.05 404.52,1620.45 v1(500,1715.93) 506.38,1722.31 R8.2 ; v1(500,1500) 610,1500 v1(1380,2270)
JTDO: J1.13 R11.2 U2.133 | length 2522
  Top Layer w6: v1(398.28,2195) 725,2195 v1(785,2135) ; v1(1060,2140) 1060.99,2139.01 1379.01,2139.01 v1(1380,2138.03) 1416.97,2138.03 1572.95,1982.05 U2.133
  Bottom Layer w6: J1.13 251.47,1660 398.28,1806.81 v1(398.28,2195) ; R11.2 599.42,1905 825,1905 v1@1057.5,2137.5 ; v1(785,2135) 787.5,2137.5 v1@1057.5,2137.5 ; v1(1060,2140) v1@1057.5,2137.5
JTMS: J1.7 R9.2 U2.105 | length 2692.5
  Top Layer w6: v1(447.69,2135) v1(447.69,1740) v1@450,1742.31 ; v1(1032.69,2720) 1680,2720 1749.57,2650.43 U2.105
  Bottom Layer w6: J1.7 251.47,1360 370,1478.53 370,1662.31 v1(447.69,1740) 497.69,1790 557.1,1790 R9.2 ; v1(447.69,2135) v1(1032.69,2720)
JTRST: J1.3 R7.2 U2.134 | length 2207.7
  Top Layer w6: v1(1380,2085) 1435,2085 1557.64,1962.36 U2.134
  Bottom Layer w6: J1.3 251.47,1160 425,1333.53 ; R7.2 517.31,1657.31 425,1565 425,1333.53 ; v1(1380,2085) 628.53,1333.53 425,1333.53
NetD1_2: D1.2 IC1.2 L1.1 | length 557.5
  Top Layer w6: L1.1 3475.69,1079.14 3693.55,1079.14 3725,1110.59 D1.2 3725,1128.31 3756.45,1159.76 3956.23,1159.76 IC1.2
NetLED1_1: LED1.1 R4.2 | length 96.5
  Top Layer w6: R4.2 3965.19,1573 3965.19,1531.7 3986.88,1510 LED1.1
NetLED2_1: LED2.1 R5.2 | length 105.7
  Top Layer w6: LED2.1 3362.5,2435 3377,2420.5 3377,2367.42 R5.2
NetP1_3: P1.3 R2.2 | length 361.9
  Bottom Layer w6: R2.2 2497,1383.27 2497,1337.48 2608.53,1225.96 2608.53,1171.47 P1.3
NetP1_4: P1.4 R3.1 | length 229.4
  Bottom Layer w6: R3.1 2572,1381.82 2572,1308 P1.4
OSC32_IN: C5.1 U2.8 X2.1 | length 786
  Top Layer w6: C5.1 1592,1023.5 1592,1108.96 1715.68,1232.64 1715.68,1290.4 X2.1 1738.27,1324.8 1828.31,1414.84 U2.8
OSC32_OUT: C6.1 U2.9 X2.4 | length 746.5
  Top Layer w6: C6.1 1695,1016.5 1728.47,1049.97 1728.47,1177.21 X2.4 1738.27,1198.82 1847.99,1308.54 U2.9
OSC_IN: C3.1 R6.2 U2.23 X1.1 | length 759.7
  Top Layer w6: X1.1 2050.51,1536.93 2123.58,1610 U2.23 U2.23@2118.8,1689.87
  Bottom Layer w6: X1.1 2050.51,1138.9 R6.2 2097.41,1068 2097.41,1023.91 2085,1011.5 C3.1
OSC_OUT: C4.1 R6.1 U2.24 X1.2 | length 796.8
  Top Layer w6: U2.24 2143.27,1605.43 2105,1567.17 2105,1435 2239.49,1300.51 X1.2
  Bottom Layer w6: C4.1 2172.59,1010.41 2172.59,1068 R6.1 2238.65,1158.06 2238.65,1191.81 X1.2
PA0: U2.34
PA1: U2.35
PA4: U2.40
PA5: U2.41
PA6: U2.42
PA7: R1.1 U1.3 U2.43 | length 2291.9
  Top Layer w6: U2.43 2563.62,1883.62 2920,2240 2920,2885 2815.68,2989.32 2602,2989.32 2480,3111.31 U1.3
  Bottom Layer w6: R1.1 2480,2655.6 U1.3
PA8: U2.100
PA11: U2.103
PA12: U2.104
PB0: U2.46
PB1: U2.47
PB5: U2.135
PB8: U2.139
PB9: U2.140
PB10: U2.69
PB11: U2.70
PB12: U2.73
PB13: U2.74
PB14: U2.75
PB15: U2.76
PC0: P2.2 U2.26 | length 1933
  Top Layer w6: P2.2 1780,165 1850.28,165 1913.33,228.06 1913.33,396.01 2410,892.67 2410,1335 2182.64,1562.36 U2.26
PC1: P3.2 U2.27 | length 1672.3
  Top Layer w6: U2.27 2202.32,1567.17 2288.53,1480.95 2289.05,1480.95 2422,1348 2422,782 2310,670 P3.2
PC2: P4.2 U2.28 | length 1788.6
  Top Layer w6: U2.28 2222.01,1567.99 2434,1356 2434,561 P4.2
PC3: U2.29
PC4: U2.44
PC5: U2.45
PC6: U2.96
PC7: U2.97
PC8: U2.98
PC9: U2.99
PC12: U2.113
PC13: U2.7
PD0: U2.114
PD1: U2.115
PD2: U2.116
PD3: U2.117
PD4: U2.118
PD5: U2.119
PD6: U2.122
PD7: U2.123
PD8: JP1.1 U2.77 | length 766.4
  Top Layer w6: U2.77 2300.75,3285.75 JP1.1
PD9: JP1.2 U2.78 | length 775.4
  Top Layer w6: JP1.2 2255,2928.87 2281.06,2902.81 U2.78
PD10: JP1.3 U2.79 | length 788
  Top Layer w6: JP1.3 2205,2944.03 2261.38,2887.65 U2.79
PD11: JP1.4 U2.80 | length 800.6
  Top Layer w6: JP1.4 2155,2959.19 2241.69,2872.49 U2.80
PD12: JP1.5 U2.81 | length 813.1
  Top Layer w6: JP1.5 2105,2974.34 2222.01,2857.34 U2.81
PD13: JP1.6 U2.82 | length 825.7
  Top Layer w6: JP1.6 2055,2989.5 2202.32,2842.18 U2.82
PD14: JP1.7 U2.85 | length 821.9
  Top Layer w6: JP1.7 2005,2984.97 2143.27,2846.71 U2.85
PD15: JP1.8 U2.86 | length 834.5
  Top Layer w6: JP1.8 1955,3000.13 2123.58,2831.55 U2.86
PE0: U2.141
PE1: U2.142
PE2: U2.1
PE3: U2.2
PE4: U2.3
PE5: U2.4
PE6: U2.5
PE7: P5.2 U2.58 | length 3702.2
  Top Layer w6: U2.58 2558.9,2178.9 2704.06,2324.06 2704.06,2484.06 2740,2520 v1(2825,2520)
  Bottom Layer w6: v1@2820,2525 v1(2825,2520) 4335,2520 4450,2405 4450,1159.25 4544.25,1065 P5.2 P5.2@4572.75,1077.75
PE8: P6.2 U2.59 | length 3180.3
  Top Layer w6: U2.59 2538.58,2198.58 2690,2350 2690,2500 2755,2565 v1(2820,2565)
  Bottom Layer w6: v1(2820,2565) 4306.97,2565 4462,2409.97 4462,1677.25 4544.25,1595 P6.2
PE9: P7.2 U2.60 | length 2694.4
  Top Layer w6: U2.60 2523.27,2218.27 2665,2360 2665,2520 2760,2615 v1(2820,2615)
  Bottom Layer w6: v1(2820,2615) 4273.94,2615 4474,2414.94 4474,2200.25 4544.25,2130 P7.2
PE10: U2.63
PE11: U2.64
PE12: U2.65
PE13: U2.66
PE14: U2.67
PE15: U2.68
PF0: U2.10
PF1: U2.11
PF2: U2.12
PF3: U2.13
PF4: U2.14
PF5: U2.15
PF6: U2.18
PF7: U2.19
PF8: U2.20
PF9: U2.21
PF10: U2.22
PF11: U2.49
PF12: U2.50
PF13: U2.53
PF14: U2.54
PF15: U2.55
PG0: U2.56
PG1: U2.57
PG2: JP1.9 U2.87 | length 847
  Top Layer w6: JP1.9 1905,3015.29 2103.9,2816.39 U2.87
PG3: JP1.10 U2.88 | length 859.6
  Top Layer w6: JP1.10 1855,3042.81 2084.21,2813.6 U2.88
PG4: U2.89
PG5: U2.90
PG6: U2.91
PG7: U2.92
PG8: U2.93
PG9: U2.124
PG10: U2.125
PG11: U2.126
PG12: U2.127
PG13: U2.128
PG14: U2.129
PG15: U2.132
RESET: C7.1 J1.15 R12.1 SW1.1 U2.25 | length 3770.9
  Top Layer w6: R12.1 142.59,502 142.59,558 154.59,570 C7.1 168.5,582 248.69,582 SW1.1@367.47,700.79 ; J1.15 251.47,1760 340.94,1670.53 340.94,727.31 SW1.1@367.47,700.79 ; v1(1015,1200) 542.31,727.31 408.71,727.31 382.19,700.79 SW1.1 SW1.1@367.47,700.79 ; v1(2162.95,1535) U2.25
  Bottom Layer w6: v1@1012.42,1202.5 1335,1535 v1(2162.95,1535)
SCL: BH1.2 U2.136 | length 1743
  Top Layer w6: BH1.2 556.97,2595 1228.98,1922.99 U2.136
SDA: BH1.3 U2.137 | length 1709.7
  Top Layer w6: BH1.3 640,2495 1231.69,1903.31 U2.137
UART1_RX: P9.2 U2.102 | length 897.7
  Top Layer w6: P9.2 1490,2968.62 1808.62,2650 U2.102
UART1_TX: P9.3 U2.101 | length 864.4
  Top Layer w6: P9.3 1590,2905 1828.31,2666.69 U2.101
UART2_RX: P8.5 U2.37 | length 1761.2
  Top Layer w6: U2.37 2525.51,1765.51 2980,2220 2980,2890 3181.06,3091.06 P8.5
UART2_TX: P8.4 U2.36 | length 1829.3
  Top Layer w6: U2.36 2379.49,1718.49 2387.98,1710 2515,1710 3110,2305 3110,2955 3146.06,2991.06 P8.4
UART4_RX: CO1.3 U2.112 | length 1456.2
  Top Layer w6: CO1.3 960,3190 1375,2775 ; v1(1435,2270) 1456,2249 1488.7,2249 1520,2280.3 1520,2365 1550,2395 1619.21,2395 U2.112
  Bottom Layer w6: v1(1385,2765) 1435,2715 v1(1435,2270)
UART4_TX: CO1.4 U2.111 | length 1387.7
  Top Layer w6: CO1.4 1060,3170 v1(1375,2855) ; v1(1480,2270) 1480,2345 1550,2415 1619.53,2415 U2.111
  Bottom Layer w6: v1(1375,2855) 1480,2750 v1(1480,2270)
pads on no net: 1.1 2.1 3.1 4.1 J1.11 J1.17 J1.19 P8.1 P8.2 P8.3 U2.106 X2.2 X2.3

## Polygon pours and split planes (outlines as drawn)
GND on Top Layer "Top Layer-GND" (hatched Horizontal grid 5 track 6, pour order 30): 0,200 cw(c201.87,200.03) 0,200.03 0,3152.79 cw(c5.01,3152.79) 0,3152.82 cw(c201.87,3152.79) 201.87,3354.65 4532.57,3354.65 cw(c4532.57,3152.79) 4734.44,3152.79 4734.44,200.03 cw(c4532.57,200.03) 4532.57,-1.83 cw(c4532.57,3.18) 4532.54,-1.83 201.87,-1.83 cw(c201.87,200.03)
GND on Top Layer "Top Layer-GND 2" (hatched Horizontal grid 4 track 5, pour order 18): 4220.29,845 4430,845 4435,840 4475,840 4510,805 4510,405 4345,240
12V on Top Layer "Top Layer-12V" (hatched Horizontal grid 4 track 5, pour order 4): 3825,1135 3830,1130 4115,1130 4170.92,1074.08 4170.91,739.08 4245,665 4245,455 3820,455 3820,1135
GND on Top Layer "Top Layer-GND 1" (hatched Horizontal grid 4 track 5, remove dead copper, pour order 24): 2860,871 3589,940 3610,919 3540,849 3540,90 3539.15,90.85 2905,90.85
no net on Top Layer "Top Layer-No Net 1" (hatched Horizontal grid 4 track 5, remove dead copper, pour order 22): 2860,960
no net on Top Layer "Top Layer-No Net 2" (hatched Horizontal grid 4 track 5, remove dead copper, pour order 20): 3321.89,791
no net on Top Layer "Top Layer-No Net" (hatched Horizontal grid 4 track 5, remove dead copper, pour order 2): 2347.48,3435
GND on Bottom Layer "Bottom Layer-GND" (hatched Horizontal grid 5 track 6, pour order 28): -3.68,201.83 cw(c198.19,201.87) -3.68,201.87 -3.68,3154.62 cw(c1.34,3154.62) -3.68,3154.65 cw(c198.19,3154.62) 198.19,3356.49 4528.9,3356.49 cw(c4528.9,3154.62) 4730.76,3154.62 4730.76,201.87 cw(c4528.9,201.87) 4528.9,0 cw(c4528.9,5.02) 4528.86,0 198.19,0 cw(c198.19,201.87)

## Keep-outs
Keep-Out Layer:
  the board outline again, w10

## Other copper
Top Layer:
  rectangle net GND: 2930,90 3075,339
  rectangle net GND: 3310,539 3540,779
  rectangle net GND: 4221.52,711 4350,839
  rectangle net GND: 4325,463 4485,739
  rectangle net GND: 4265,687 4394.82,835
  rectangle net 12V: 4125,475 4203,531
  rectangle net 12V: 4135,647 4183,711
  rectangle net 12V: 4095,543 4137.63,615
  rectangle net 12V: 3900,1075 3920,1103
  rectangle net 12V: 3990,1083 4025,1103
  rectangle net 12V: 4040,615 4070,711
  rectangle net 12V: 3865,615 4070,623
  rectangle net 12V: 3830,623 3865,743
  rectangle net 12V: 3875,591 4030,660
  rectangle net 12V: 3875,695 3955,767
  rectangle net 12V: 3940,691 4030,767
  rectangle net 12V: 3920,1051 3965,1075
  rectangle net 12V: 3965,1051 4005,1075

## Silkscreen, mask and mechanical layers (free items; w line width, h text height)
Top Overlay:
  text "5V" at 3155,3270 h30
  text "GND" at 3120,3170 h30
  text "G3" at 1875,3146.06 h30 r90
  text "G2" at 1923.89,3146.06 h30 r90
  text "D15" at 1972.78,3146.06 h30 r90
  text "D14" at 2021.67,3146.06 h30 r90
  text "D13" at 2070.56,3146.06 h30 r90
  text "D12" at 2119.44,3146.06 h30 r90
  text "D11" at 2168.33,3146.06 h30 r90
  text "D10" at 2217.22,3146.06 h30 r90
  text "D9" at 2266.11,3146.06 h30 r90
  text "D8" at 2315,3146.06 h30 r90
  text "3V3" at 1410,3140 h30 r90
  text "1RX" at 1511.67,3140 h30 r90
  text "1TX" at 1613.33,3140 h30 r90
  text "GND" at 1715,3140 h30 r90
  text "2RX" at 3130,3070 h30
  text "5V" at 775,3005 h30 r90
  text "GND" at 880,3005 h30 r90
  text "4RX" at 985,3005 h30 r90
  text "4TX" at 1080,3005 h30 r90
  text "2TX" at 3130,2970 h30
  text "A7" at 2500,2869.99 h30 r90
  text "5V" at 2905,2869.99 h30 r90
  text "GND" at 2702.5,2840 h30 r90
  text "5V" at 290,2675 h30
  text "SCL" at 295,2575 h30
  text "SDA" at 295,2470 h30
  text "GND" at 290,2365 h30
  text "GND" at 295,2270 h30
  text "GND" at 4330,2265 h30
  text "E9" at 4359.99,2092.5 h30
  text "5V" at 4359.99,1920 h30
  text "GND" at 4330,1747.5 h30
  text "E8" at 4359.99,1575 h30
  text "5V" at 4359.99,1402.5 h30
  text "GND" at 2785,1284.18 h30 r90
  text "3V3" at 2580,1270 h30 r90
  text "BOOT1" at 2685,1270 h30 r90
  text "植物工厂V1.0" at 1220,1260 h120 r90
  text "GND" at 4330,1230 h30
  text "E7" at 4359.99,1057.5 h30
  text "3V3" at 2585,970 h30 r90
  text "GND" at 2795,960 h30 r90
  text "BOOT0" at 2690,890 h30 r90
  text "5V" at 4359.99,885 h30
  text "12V" at 1595,312 h30
  text "C0" at 1766.88,312 h30
  text "GND" at 1938.75,312 h30
  text "12V" at 2110.62,312 h30
  text "C1" at 2282.5,312 h30
  text "GND" at 2454.38,312 h30
  text "12V" at 2626.25,312 h30
  text "C2" at 2798.12,312 h30
  text "GND" at 2970,312 h30
Mechanical 1:
  the board outline again, w10

## Text inside footprints (layer, text, board x,y; h text height)
P1: Top Overlay "6" at 2830,1190 h50; Top Overlay "5" at 2830,1090 h50; Top Overlay "2" at 2470,1190 h50; Top Overlay "1" at 2490,1090 h50